# Altium PCB Sensor Bar 2.0 by GAO.PcbDoc (part 1 of 3)
Units mil, origin at the board's own origin, x right, y up, seen from the top; angles counter-clockwise.
Board outline 6710 x 1765 mil, 2 copper layers (Top Layer, Bottom Layer); 247 components, 162 nets, 624 pads, 280 vias.
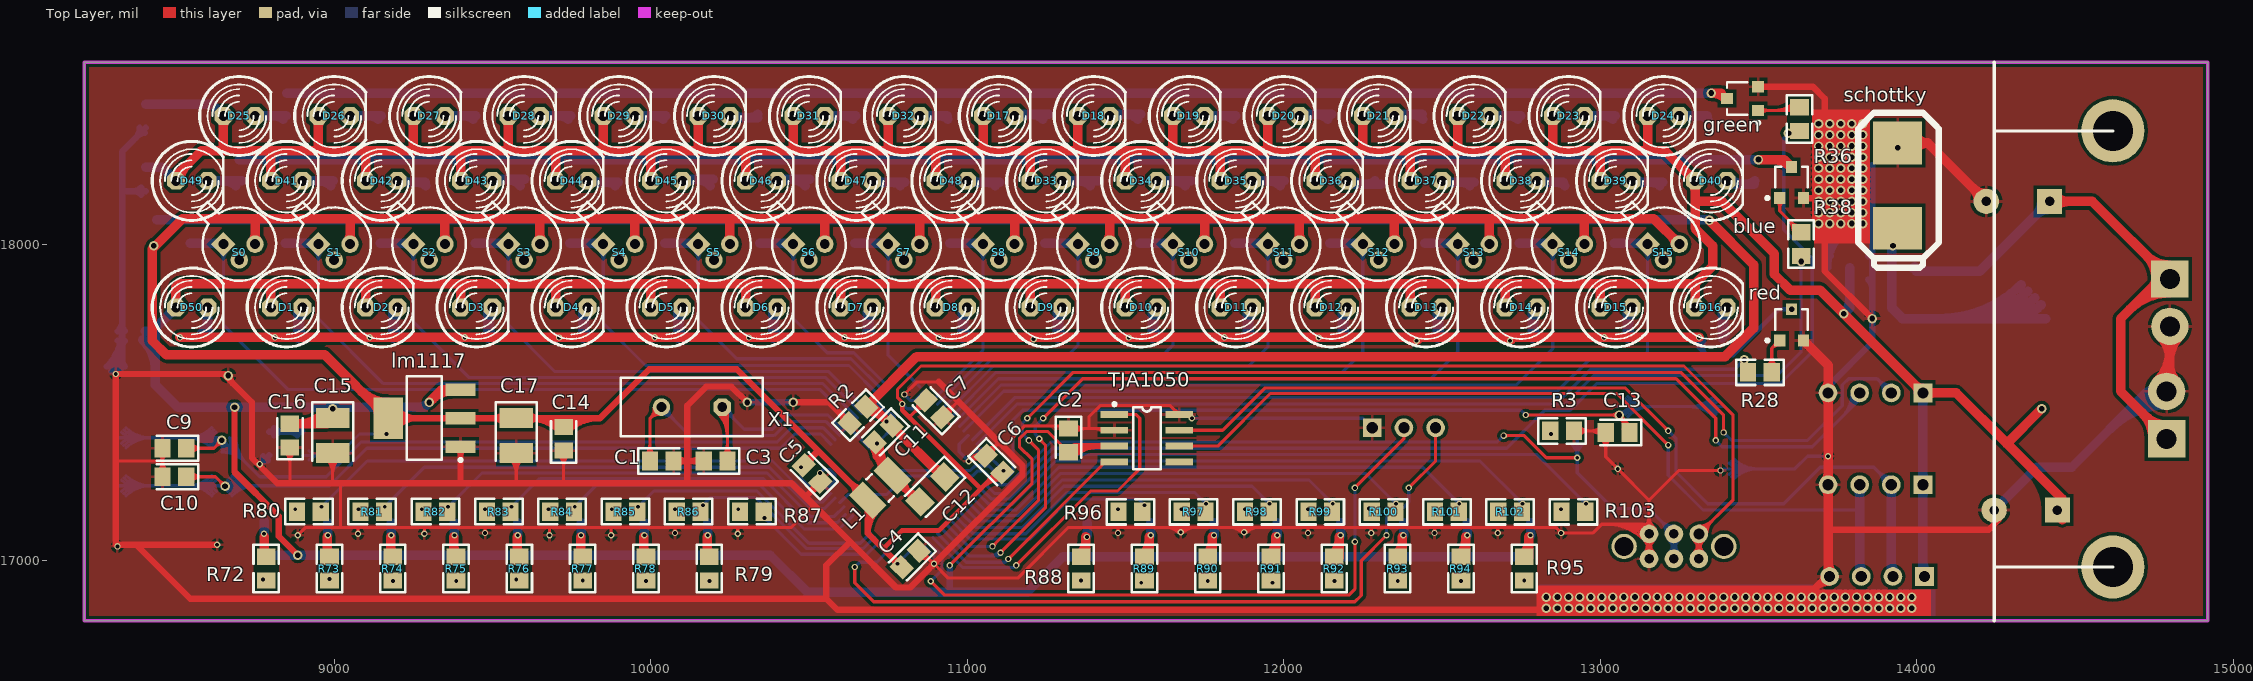
[diagram p0: Top Layer view]
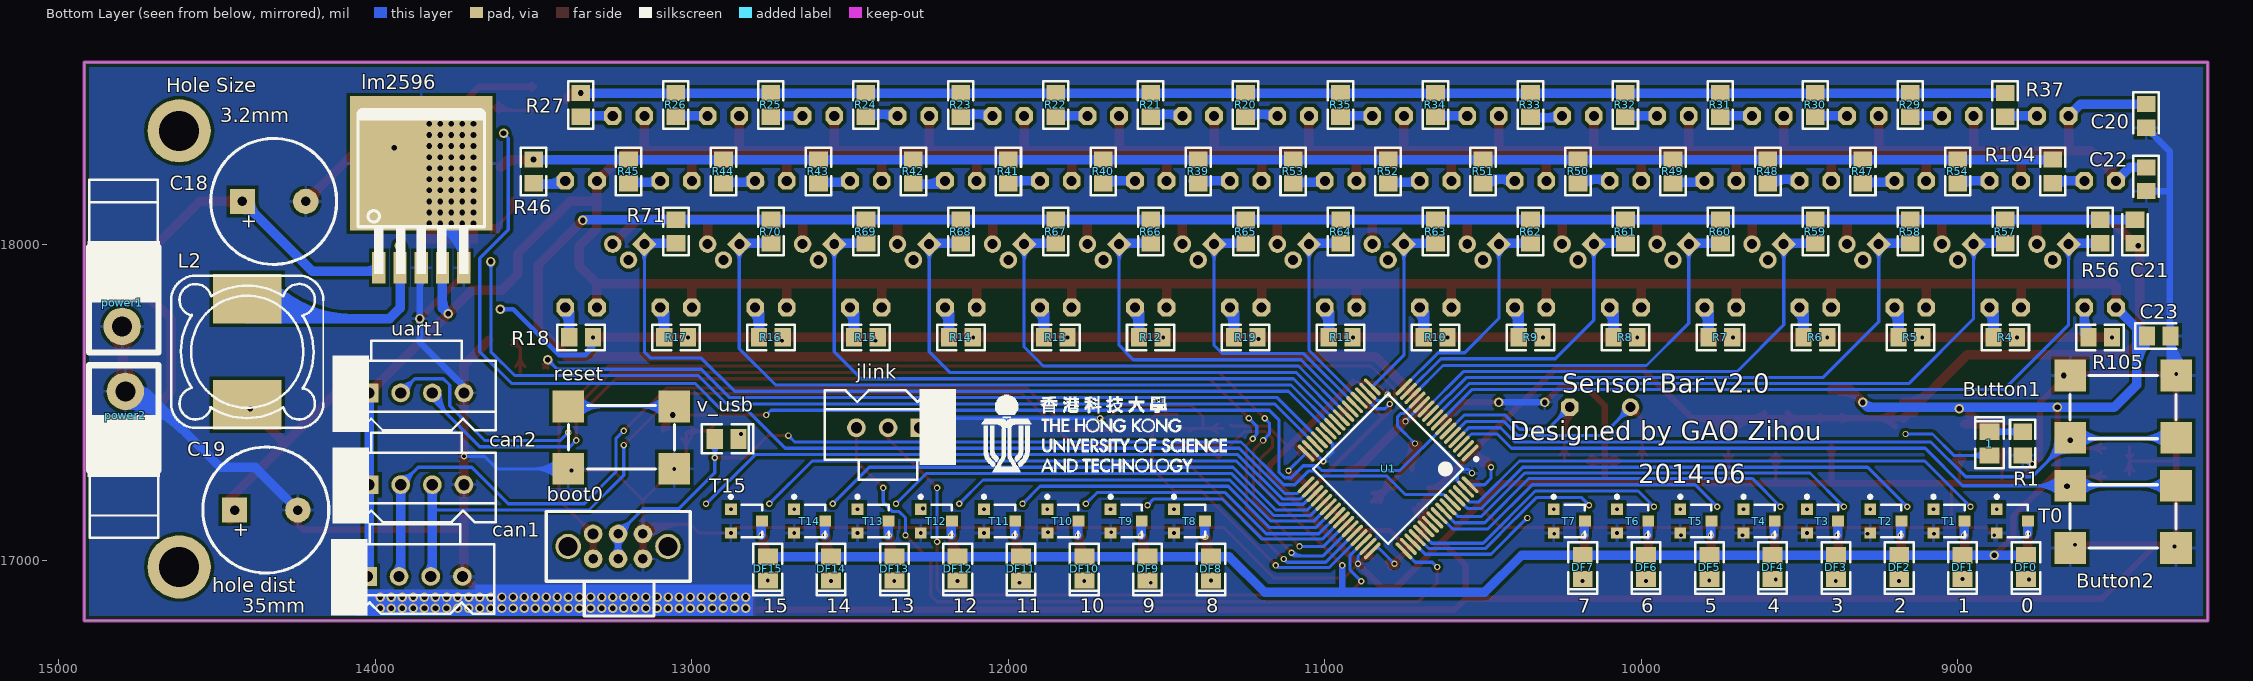
[diagram p1: Bottom Layer view, seen from below]
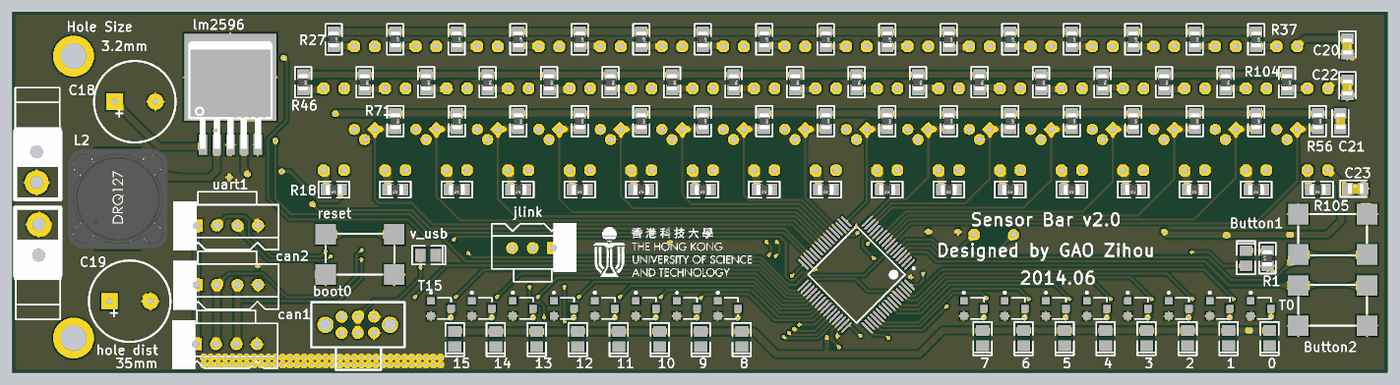
[diagram p4: 3D render of the assembled board from below, using the file's embedded part models]

## Layer stack, top to bottom
Top Solder: solder mask 0.4, Solder Resist, Dk 3.5
Top Layer: signal copper 1.4
Dielectric1: dielectric 12.6, FR-4, Dk 4.8
Bottom Layer: signal copper 1.4
Bottom Solder: solder mask 0.4, Solder Resist, Dk 3.5

## Board outline
8210,18575 8210,16810 14920,16810 14920,18575

## Design rules (kind name [scope] priority, off if disabled: settings)
Clearance [All] p1: gap=7
HoleSize [All] p1: absolutevalues=TRUE maxlimit=500 minlimit=1 maxpercent=80.000 minpercent=20.000
HoleToHoleClearance [All] p1: gap=0 allowstackedmicrovias=TRUE
MinimumSolderMaskSliver [All] p1: minsoldermaskwidth=0
PolygonConnect [All] p1: connectstyle=Relief reliefconductorwidth=10 reliefentries=4 polygonreliefangle="90 Angle" airgapwidth=10
RoutingVias [All] p1: holewidth=12 width=18 viastyle="Through Hole" minholewidth=12 minwidth=18 maxholewidth=100 maxwidth=200
SilkToSilkClearance [All] p1: silktosilkclearance=0
SilkToSolderMaskClearance SilkscreenOverComponentPads [IsPad] p1: minsilkscreentomaskgap=0 clearancetoexposedcopper=TRUE
SolderMaskExpansion [All] p1: expansion=4
UnpouredPolygon [All] p1: allowunpoured=FALSE
Width [All] p1: maxlimit=500 minlimit=10 preferedwidth=10
24 further rules are at their usual default settings.

## Classes and differential pairs
component class "Sensor Bar 2.0 RGB LED": blue green R28 R36 R38 red
component class redx: C20 D1 D2 D3 D4 D5 D6 D7 D8 D9 D10 D11 D12 D13 D14 D15 D16 D50 R4 R5 R6 R7 R8 R9 R10 R11 R12 R13 R14 R15 R16 R17 R18 R19 R105
component class green: C22 D17 D18 D19 D20 D21 D22 D23 D24 D25 D26 D27 D28 D29 D30 D31 D32 R20 R21 R22 R23 R24 R25 R26 R27 R29 R30 R31 R32 R33 R34 R35 R37
component class blue: C23 D33 D34 D35 D36 D37 D38 D39 D40 D41 D42 D43 D44 D45 D46 D47 D48 D49 R39 R40 R41 R42 R43 R44 R45 R46 R47 R48 R49 R50 R51 R52 R53 R54 R104
component class "Sensor Bar 2.0 by GAO": 1 *1 boot0 Button1 Button2 C1 C2 C3 C4 C5 C6 C7 C9 C10 C11 C12 C13 can1 can2 jlink L1 R1 R2 R3 reset T16 TJA1050 U1 uart1 v_usb X1
component class "Sensor Bar 2.0 regulators": C14 C15 C16 C17 C18 C19 L2 lm1117 lm2596 power1 power2 schottky
component class "Sensor Bar 2.0 sensors": C21 R56 R57 R58 R59 R60 R61 R62 R63 R64 R65 R66 R67 R68 R69 R70 R71 S0 S1 S2 S3 S4 S5 S6 S7 S8 S9 S10 S11 S12 S13 S14 S15
component class "Sensor Bar 2.0 signal LED": DF0 DF1 DF2 DF3 DF4 DF5 DF6 DF7 DF8 DF9 DF10 DF11 DF12 DF13 DF14 DF15 R72 R73 R74 R75 R76 R77 R78 R79 R80 R81 R82 R83 R84 R85 R86 R87 R88 R89 R90 R91 R92 R93 R94 R95 R96 R97 R98 R99 R100 R101 R102 R103 T0 T1 T2 T3 T4 T5 T6 T7 T8 T9 T10 T11 T12 T13 T14 T15

## Components (designator, comment, footprint, x,y, rotation, side; value= is the part's Value field where it differs from the comment)
1 "LED" "SMD _LED" 8900,17370 r270 bottom
blue "TO3400_MOSFET" npn 13610,18200 r0 top
boot0 "Power Switch" "POWER SWITCH" 13430,17045 r180 bottom
Button1 "Button" "PUSH SWITCH" 8310,17585 r0 bottom
Button2 "Button" "PUSH SWITCH" 8645,17040 r180 bottom
C1 "20pF" CC2012-0805 10035,17315 r0 top
C2 "100nF" CC2012-0805 11320,17380 r270 top
C3 "20pF" CC2012-0805 10205,17315 r180 top
C4 "100nF" CC2012-0805 10820,17005 r225 top
C5 "100nF" CC2012-0805 10510,17275 r135 top
C6 "100nF" CC2012-0805 11085,17305 r315 top
C7 "100nF" CC2012-0805 10895,17480 r135 top
C9 "100nF" CC2012-0805 8495,17355 r180 top
C10 "100nF" CC2012-0805 8495,17265 r180 top
C11 "100nF" CC2012-0805 10735,17400 r225 top
C12 "10uF" CC3216-1206 10890,17225 r225 top
C13 "100nF" CC2012-0805 13055,17405 r180 top
C14 "10nF" CC2012-0805 9725,17385 r90 top
C15 "10uF" CC3225-1210 8995,17395 r270 top
C16 "10nF" CC2012-0805 8860,17395 r90 top
C17 "10uF" CC3225-1210 9575,17395 r270 top
C18 "470uF" 470UF/50V 14420,18135 r180 bottom
C19 "470uF" 470UF/50V 14445,17160 r180 bottom
C20 "100nF" CC2012-0805 8405,18405 r270 bottom
C21 "100nF" CC2012-0805 8440,18040 r90 bottom
C22 "100nF" CC2012-0805 8405,18205 r270 bottom
C23 "100nF" CC2012-0805 8365,17710 r180 bottom
can1 "CONN0M" LOCKEDHDR-4 13875,16950 r180 bottom
can2 "CONN0M" LOCKEDHDR-4 13870,17240 r180 bottom
D1 "red_LED" LED5MM 8850,17800 r0 top
D2 "red_LED" LED5MM 9150,17800 r0 top
D3 "red_LED" LED5MM 9450,17800 r0 top
D4 "red_LED" LED5MM 9750,17800 r0 top
D5 "red_LED" LED5MM 10050,17800 r0 top
D6 "red_LED" LED5MM 10350,17800 r0 top
D7 "red_LED" LED5MM 10650,17800 r0 top
D8 "red_LED" LED5MM 10950,17800 r0 top
D9 "red_LED" LED5MM 11250,17800 r0 top
D10 "red_LED" LED5MM 11550,17800 r0 top
D11 "red_LED" LED5MM 11850,17800 r0 top
D12 "red_LED" LED5MM 12150,17800 r0 top
D13 "red_LED" LED5MM 12450,17800 r0 top
D14 "red_LED" LED5MM 12750,17800 r0 top
D15 "red_LED" LED5MM 13050,17800 r0 top
D16 "red_LED" LED5MM 13350,17800 r0 top
D17 "green_LED" LED5MM 11100,18405 r0 top
D18 "green_LED" LED5MM 11400,18405 r0 top
D19 "green_LED" LED5MM 11700,18405 r0 top
D20 "green_LED" LED5MM 12000,18405 r0 top
D21 "green_LED" LED5MM 12300,18405 r0 top
D22 "green_LED" LED5MM 12600,18405 r0 top
D23 "green_LED" LED5MM 12900,18405 r0 top
D24 "green_LED" LED5MM 13200,18405 r0 top
D25 "green_LED" LED5MM 8700,18405 r0 top
D26 "green_LED" LED5MM 9000,18405 r0 top
D27 "green_LED" LED5MM 9300,18405 r0 top
D28 "green_LED" LED5MM 9600,18405 r0 top
D29 "green_LED" LED5MM 9900,18405 r0 top
D30 "green_LED" LED5MM 10200,18405 r0 top
D31 "green_LED" LED5MM 10500,18405 r0 top
D32 "green_LED" LED5MM 10800,18405 r0 top
D33 "blue_LED" LED5MM 11250,18200 r0 top
D34 "blue_LED" LED5MM 11550,18200 r0 top
D35 "blue_LED" LED5MM 11850,18200 r0 top
D36 "blue_LED" LED5MM 12150,18200 r0 top
D37 "blue_LED" LED5MM 12450,18200 r0 top
D38 "blue_LED" LED5MM 12750,18200 r0 top
D39 "blue_LED" LED5MM 13050,18200 r0 top
D40 "blue_LED" LED5MM 13350,18200 r0 top
D41 "blue_LED" LED5MM 8850,18200 r0 top
D42 "blue_LED" LED5MM 9150,18200 r0 top
D43 "blue_LED" LED5MM 9450,18200 r0 top
D44 "blue_LED" LED5MM 9750,18200 r0 top
D45 "blue_LED" LED5MM 10050,18200 r0 top
D46 "blue_LED" LED5MM 10350,18200 r0 top
D47 "blue_LED" LED5MM 10650,18200 r0 top
D48 "blue_LED" LED5MM 10950,18200 r0 top
D49 "blue_LED" LED5MM 8550,18200 r0 top
D50 "red_LED" LED5MM 8550,17800 r0 top
DF0 "LED_feedback" "SMD _LED" 8785,16979.88 r90 bottom
DF1 "LED_feedback" "SMD _LED" 8985,16979.88 r90 bottom
DF2 "LED_feedback" "SMD _LED" 9185,16979.88 r90 bottom
DF3 "LED_feedback" "SMD _LED" 9385,16979.88 r90 bottom
DF4 "LED_feedback" "SMD _LED" 9585,16979.88 r90 bottom
DF5 "LED_feedback" "SMD _LED" 9785,16979.88 r90 bottom
DF6 "LED_feedback" "SMD _LED" 9985,16979.88 r90 bottom
DF7 "LED_feedback" "SMD _LED" 10185,16979.88 r90 bottom
DF8 "LED_feedback" "SMD _LED" 11360,16974.88 r90 bottom
DF9 "LED_feedback" "SMD _LED" 11560,16974.88 r90 bottom
DF10 "LED_feedback" "SMD _LED" 11760,16974.88 r90 bottom
DF11 "LED_feedback" "SMD _LED" 11960,16974.88 r90 bottom
DF12 "LED_feedback" "SMD _LED" 12160,16974.88 r90 bottom
DF13 "LED_feedback" "SMD _LED" 12360,16974.88 r90 bottom
DF14 "LED_feedback" "SMD _LED" 12560,16974.88 r90 bottom
DF15 "LED_feedback" "SMD _LED" 12760,16974.88 r90 bottom
green "TO3400_MOSFET" npn 13445,18465 r90 top
jlink "ARMP" LOCKEDHDR-3 12380,17420 r0 bottom
L1 "10uH" CR3225-1210 10725,17230 r225 top
L2 "100uH" MSS1260 14405,17660 r180 bottom
lm1117 "LM1117MP-3.3" MP04A_N 9285,17450 r180 top
lm2596 "lm2596" lm2596 13850,18250 r90 bottom
power1 "Component_1" PCBComponent_1 14805,17835 r270 bottom
power2 "Component_1" PCBComponent_1 14785,17440 r90 bottom
R1 "330R" CR2012-0805 8795,17370 r90 bottom
R2 "oR" CR2012-0805 10655,17460 r45 top
R3 "330R" CR2012-0805 12880,17410 r180 top
R4 "150R" CR2012-0805 8850,17705.4 r0 bottom
R5 "150R" CR2012-0805 9150,17705.4 r0 bottom
R6 "150R" CR2012-0805 9450,17705.4 r0 bottom
R7 "150R" CR2012-0805 9750,17705.4 r0 bottom
R8 "150R" CR2012-0805 10050,17705.4 r0 bottom
R9 "150R" CR2012-0805 10350,17705.4 r0 bottom
R10 "150R" CR2012-0805 10650,17705.4 r0 bottom
R11 "150R" CR2012-0805 10950,17705.4 r0 bottom
R12 "150R" CR2012-0805 11550,17705.4 r0 bottom
R13 "150R" CR2012-0805 11850,17705.4 r0 bottom
R14 "150R" CR2012-0805 12150,17705.4 r0 bottom
R15 "150R" CR2012-0805 12450,17705.4 r0 bottom
R16 "150R" CR2012-0805 12750,17705.4 r0 bottom
R17 "150R" CR2012-0805 13050,17705.4 r0 bottom
R18 "150R" CR2012-0805 13350,17705.4 r0 bottom
R19 "150R" CR2012-0805 11250,17705.4 r0 bottom
R20 "100R" CR2012-0805 11250.39,18440 r270 bottom
R21 "100R" CR2012-0805 11550.39,18440 r270 bottom
R22 "100R" CR2012-0805 11850.39,18440 r270 bottom
R23 "100R" CR2012-0805 12150.39,18440 r270 bottom
R24 "100R" CR2012-0805 12450.39,18440 r270 bottom
R25 "100R" CR2012-0805 12750.79,18440 r270 bottom
R26 "100R" CR2012-0805 13050.79,18440 r270 bottom
R27 "100R" CR2012-0805 13350.79,18440 r270 bottom
R28 "33R" CR2012-0805 13505,17595 r0 top
R29 "100R" CR2012-0805 9150.39,18440 r270 bottom
R30 "100R" CR2012-0805 9450.39,18440 r270 bottom
R31 "100R" CR2012-0805 9750.39,18440 r270 bottom
R32 "100R" CR2012-0805 10050.39,18440 r270 bottom
R33 "100R" CR2012-0805 10350.39,18440 r270 bottom
R34 "100R" CR2012-0805 10650.39,18440 r270 bottom
R35 "100R" CR2012-0805 10950.39,18440 r270 bottom
R36 "33R" CR2012-0805 13630,18395 r90 top
R37 "100R" CR2012-0805 8850.39,18440 r270 bottom
R38 "33R" CR2012-0805 13635,18000 r90 top
R39 "100R" CR2012-0805 11400,18230 r270 bottom
R40 "100R" CR2012-0805 11700,18230 r270 bottom
R41 "100R" CR2012-0805 12000,18230 r270 bottom
R42 "100R" CR2012-0805 12300,18230 r270 bottom
R43 "100R" CR2012-0805 12600,18230 r270 bottom
R44 "100R" CR2012-0805 12900,18230 r270 bottom
R45 "100R" CR2012-0805 13200,18230 r270 bottom
R46 "100R" CR2012-0805 13500,18230 r270 bottom
R47 "100R" CR2012-0805 9300,18230 r270 bottom
R48 "100R" CR2012-0805 9600,18230 r270 bottom
R49 "100R" CR2012-0805 9900,18230 r270 bottom
R50 "100R" CR2012-0805 10200,18230 r270 bottom
R51 "100R" CR2012-0805 10500,18230 r270 bottom
R52 "100R" CR2012-0805 10800,18230 r270 bottom
R53 "100R" CR2012-0805 11100,18230 r270 bottom
R54 "100R" CR2012-0805 9000,18230 r270 bottom
R56 "470k" CR2012-0805 8550,18040 r270 bottom
R57 "470k" CR2012-0805 8850,18040 r270 bottom
R58 "470k" CR2012-0805 9150,18040 r270 bottom
R59 "470k" CR2012-0805 9450,18040 r270 bottom
R60 "470k" CR2012-0805 9750,18040 r270 bottom
R61 "470k" CR2012-0805 10050,18040 r270 bottom
R62 "470k" CR2012-0805 10350,18040 r270 bottom
R63 "470k" CR2012-0805 10650,18040 r270 bottom
R64 "470k" CR2012-0805 10950,18040 r270 bottom
R65 "470k" CR2012-0805 11250,18040 r270 bottom
R66 "470k" CR2012-0805 11550,18040 r270 bottom
R67 "470k" CR2012-0805 11850,18040 r270 bottom
R68 "470k" CR2012-0805 12150,18040 r270 bottom
R69 "470k" CR2012-0805 12450,18040 r270 bottom
R70 "470k" CR2012-0805 12750,18040 r270 bottom
R71 "470k" CR2012-0805 13050,18040 r270 bottom
R72 "330R" CR2012-0805 8785,16975 r270 top
R73 "330R" CR2012-0805 8985,16975 r270 top
R74 "330R" CR2012-0805 9185,16975 r270 top
R75 "330R" CR2012-0805 9385,16975 r270 top
R76 "330R" CR2012-0805 9585,16975 r270 top
R77 "330R" CR2012-0805 9785,16975 r270 top
R78 "330R" CR2012-0805 9985,16975 r270 top
R79 "330R" CR2012-0805 10185,16975 r270 top
R80 "10k" CR2012-0805 8920,17155 r0 top
R81 "10k" CR2012-0805 9120,17155 r0 top
R82 "10k" CR2012-0805 9320,17155 r0 top
R83 "10k" CR2012-0805 9520,17155 r0 top
R84 "10k" CR2012-0805 9720,17155 r0 top
R85 "10k" CR2012-0805 9920,17155 r0 top
R86 "10k" CR2012-0805 10120,17155 r0 top
R87 "10k" CR2012-0805 10320,17155 r0 top
R88 "330R" CR2012-0805 11360,16975 r270 top
R89 "330R" CR2012-0805 11560,16975 r270 top
R90 "330R" CR2012-0805 11760,16975 r270 top
R91 "330R" CR2012-0805 11960,16975 r270 top
R92 "330R" CR2012-0805 12160,16975 r270 top
R93 "330R" CR2012-0805 12360,16975 r270 top
R94 "330R" CR2012-0805 12560,16975 r270 top
R95 "330R" CR2012-0805 12760,16975 r270 top
R96 "10k" CR2012-0805 11515.63,17154.21 r0 top
R97 "10k" CR2012-0805 11715.63,17154.21 r0 top
R98 "10k" CR2012-0805 11915.63,17154.21 r0 top
R99 "10k" CR2012-0805 12115.63,17154.21 r0 top
R100 "10k" CR2012-0805 12315.63,17154.21 r0 top
R101 "10k" CR2012-0805 12515.63,17154.21 r0 top
R102 "10k" CR2012-0805 12715.63,17154.21 r0 top
R103 "10k" CR2012-0805 12915.63,17154.21 r0 top
R104 "100R" CR2012-0805 8700,18230 r270 bottom
R105 "150R" CR2012-0805 8550,17705.4 r0 bottom
red "TO3400_MOSFET" npn 13610,17750 r0 top
reset "Button" "PUSH SWITCH" 13390,17290 r180 bottom
S0 "3du5c" CAN-3/D5.9 8700,18000 r0 top
S1 "3du5c" CAN-3/D5.9 9000,18000 r0 top
S2 "3du5c" CAN-3/D5.9 9300,18000 r0 top
S3 "3du5c" CAN-3/D5.9 9600,18000 r0 top
S4 "3du5c" CAN-3/D5.9 9900,18000 r0 top
S5 "3du5c" CAN-3/D5.9 10200,18000 r0 top
S6 "3du5c" CAN-3/D5.9 10500,18000 r0 top
S7 "3du5c" CAN-3/D5.9 10800,18000 r0 top
S8 "3du5c" CAN-3/D5.9 11100,18000 r0 top
S9 "3du5c" CAN-3/D5.9 11400,18000 r0 top
S10 "3du5c" CAN-3/D5.9 11700,18000 r0 top
S11 "3du5c" CAN-3/D5.9 12000,18000 r0 top
S12 "3du5c" CAN-3/D5.9 12300,18000 r0 top
S13 "3du5c" CAN-3/D5.9 12600,18000 r0 top
S14 "3du5c" CAN-3/D5.9 12900,18000 r0 top
S15 "3du5c" CAN-3/D5.9 13200,18000 r0 top
schottky "D Schottky SS84" sch_diode 13945,18190 r90 top
T0 "bc847" npn 8822.5,17120 r270 bottom
T1 "bc847" npn 9022.5,17120 r270 bottom
T2 "bc847" npn 9222.5,17120 r270 bottom
T3 "bc847" npn 9422.5,17120 r270 bottom
T4 "bc847" npn 9622.5,17120 r270 bottom
T5 "bc847" npn 9822.5,17120 r270 bottom
T6 "bc847" npn 10022.5,17120 r270 bottom
T7 "bc847" npn 10222.5,17120 r270 bottom
T8 "bc847" npn 11422.5,17120 r270 bottom
T9 "bc847" npn 11622.5,17120 r270 bottom
T10 "bc847" npn 11822.5,17120 r270 bottom
T11 "bc847" npn 12022.5,17120 r270 bottom
T12 "bc847" npn 12222.5,17120 r270 bottom
T13 "bc847" npn 12422.5,17120 r270 bottom
T14 "bc847" npn 12622.5,17120 r270 bottom
T15 "bc847" npn 12822.5,17120 r270 bottom
TJA1050 "tja1050" ad8210 11570,17370 r0 top
U1 "STM32F103RBT6" LQFP64_N 10800,17290 r315 bottom
uart1 "CONN0M" LOCKEDHDR-4 13870,17530 r180 bottom
v_usb "LED" "SMD _LED" 12890,17385 r0 bottom
X1 "8.000MHz" BCY-W2/E4.7 10130,17485 r180 top

## Footprints (in the part's own frame and the unit in brackets; to place one, negate y for a bottom-side part, rotate by r counter-clockwise, add the part's x,y. Pads: shape width x height; smd on the part's side, far side on the other; paste and mask are expansions set on the pad)
470UF/50V [mil]
  rect 80x80 hole 30: 1(0,0)
  round 80 hole 30: 2(200,0)
  silkscreen extent -100,-199 298,199
ad8210 [mm]
  rect 2.2x0.55 smd: 1(-2.66,2.337) 2(-2.66,1.067) 3(-2.66,-0.203) 4(-2.66,-1.473) 5(2.54,-1.473) 6(2.54,-0.203) 7(2.54,1.067) 8(2.54,2.337)
  silkscreen extent -2.78,-2.07 1.04,3.29, body extent -3,-2.07 3,2.83, height 1.7
BCY-W2/E4.7 [mm]
  oct 1.4x1.4 hole 0.8: 1(-2.44,-0.002)
  round 1.4 hole 0.8: 2(2.44,-0.002)
  silkscreen extent -5.7,-2.35 5.7,2.35
CAN-3/D5.9 [mm]
  rect 1.4x1.4 hole 0.8 rot 45: 1(-1.27,0)
  round 1.4 hole 0.8: 2(0,-1.27) 3(1.27,0)
  silkscreen extent -3.39,-2.95 2.95,3.39
CC2012-0805 [mm] "Chip Capacitor; Body 2.0 x 1.2 mm (LxW typ)"
  rect 1.3x1.5 smd: 1(-0.95,0) 2(0.95,0)
  silkscreen extent -1.91,-1.02 1.4,1.02, body extent -1,-0.64 1,0.62, height 0.78
CC3216-1206 [mm] "Chip Capacitor; Body 3.2 x 1.6 mm (LxW typ)"
  rect 1.6x1.8 smd: 1(-1.4,0) 2(1.4,0)
  silkscreen extent -2.54,-1.19 1.93,1.19, body extent -1.63,-0.84 1.57,0.76, height 1
CC3225-1210 [mm] "Chip Capacitor; Body 3.2 x 2.5 mm (LxW typ)"
  rect 1.6x2.7 smd: 1(-1.4,0) 2(1.4,0)
  silkscreen extent -2.67,-1.65 2.03,1.65
CR2012-0805 [mm] "Chip Resistor; Body 2.0 x 1.3 mm (LxW typ)"
  rect 1.3x1.5 smd: 1(-0.95,0) 2(0.95,0)
  silkscreen extent -1.91,-1.02 1.91,1.02, body extent -1,-0.62 1,0.64, height 0.78
CR3225-1210 [mm] "Chip Resistor; Body 3.2 x 2.5 mm (LxW typ)"
  rect 1.6x2.7 smd: 1(-1.4,0) 2(1.4,0)
  silkscreen extent -0.3,-1.25 0.3,1.25, body extent -1.05,-0.74 0.97,0.53, height 0.61
LED5MM [mil] "LED 5 mm, round"
  oct 56x56 hole 32: 1(-50,0) 2(50,0)
  silkscreen extent -125,-125 100,125
lm2596 [mil]
  rect 425x450 smd: 0(5,5)
  rect 100x42 smd: 1(-325,139) 2(-325,72) 3(-325,5) 4(-325,-62) 5(-325,-129)
  silkscreen extent -345,-195 175,205
LOCKEDHDR-3 [mm] "3-pin header with lock"
  rect 1.5x1.5 hole 0.9: 1(-2.54,0)
  round 1.5 hole 0.9: 2(0,0) 3(2.54,0)
  silkscreen extent -5.46,-3.13 5.08,4.18
LOCKEDHDR-4 [mm] "5-pin header with lock"
  rect 1.5x1.5 hole 0.9: 1(-3.81,0)
  round 1.5 hole 0.9: 2(-1.27,0) 3(1.27,0) 4(3.81,0)
  silkscreen extent -6.73,-3.13 6.37,4.18
LQFP64_N [mm]
  oval 1.8x0.3 smd: 1(-5.55,3.75) 2(-5.55,3.25) 3(-5.55,2.75) 4(-5.55,2.25) 5(-5.55,1.75) 6(-5.55,1.25) 7(-5.55,0.75) 8(-5.55,0.25) 9(-5.55,-0.25) 10(-5.55,-0.75) 11(-5.55,-1.25) 12(-5.55,-1.75) 13(-5.55,-2.25) 14(-5.55,-2.75) 15(-5.55,-3.25) 16(-5.55,-3.75) 33(5.55,-3.75) 34(5.55,-3.25) 35(5.55,-2.75) 36(5.55,-2.25) 37(5.55,-1.75) 38(5.55,-1.25) 39(5.55,-0.75) 40(5.55,-0.25) 41(5.55,0.25) 42(5.55,0.75) 43(5.55,1.25) 44(5.55,1.75) 45(5.55,2.25) 46(5.55,2.75) 47(5.55,3.25) 48(5.55,3.75)
  oval 0.3x1.8 smd: 17(-3.75,-5.55) 18(-3.25,-5.55) 19(-2.75,-5.55) 20(-2.25,-5.55) 21(-1.75,-5.55) 22(-1.25,-5.55) 23(-0.75,-5.55) 24(-0.25,-5.55) 25(0.25,-5.55) 26(0.75,-5.55) 27(1.25,-5.55) 28(1.75,-5.55) 29(2.25,-5.55) 30(2.75,-5.55) 31(3.25,-5.55) 32(3.75,-5.55) 49(3.75,5.55) 50(3.25,5.55) 51(2.75,5.55) 52(2.25,5.55) 53(1.75,5.55) 54(1.25,5.55) 55(0.75,5.55) 56(0.25,5.55) 57(-0.25,5.55) 58(-0.75,5.55) 59(-1.25,5.55) 60(-1.75,5.55) 61(-2.25,5.55) 62(-2.75,5.55) 63(-3.25,5.55) 64(-3.75,5.55)
  silkscreen extent -5.67,-4.25 4.25,4.57
MP04A_N [mm] "SOT223, 4-Leads, Body 6.5x3.5mm, Pitch 2.3mm, Lead Span 7mm, IPC Medium Density"
  rect 2.4x1 smd: 1(-2.9,2.3) 2(-2.9,0) 3(-2.9,-2.3)
  rect 2.4x3.3 smd: 4(2.9,0)
  silkscreen extent -3.03,-3.35 1.4,3.47, body extent -1.85,-3.35 1.85,3.35, height 1.8
MSS1260 [mm]
  rect 5.5x4 smd: 1(0.004,4.25) 2(0.004,-4.25)
  silkscreen extent -6.1,-6.1 6.1,6.1, body extent -6.22,-6.25 6.28,6.25, height 7.5
npn [mm]
  rect 0.9x0.95 smd: 1(-1.077,-1.377) 2(0.823,-1.377) 3(-0.127,1.123)
  silkscreen extent -2.2,-1.5 1.17,1.12
PCBComponent_1 [mm]
  rect 3x3 hole 1.6: 1(-1.397,0.127)
  round 3 hole 1.6: 2(2.413,0.127)
  silkscreen extent -9.35,-2.67 4.5,3.17
"POWER SWITCH" [mm]
  round 2.032 hole 1.524: 0(1,0) 0(9,0)
  round 1.5 hole 0.762: 1(3,-1) 3(5,-1) 4(5,1) 5(7,-1) 6(7,1)
  round 1.5 hole 0.9: 2(3,1)
  silkscreen extent -0.76,-5.59 10.79,2.79
"PUSH SWITCH" [mm]
  rect 2.54x2.54 smd: 1(0,0) 1(8.5,0) 2(0,5) 2(8.5,5)
  silkscreen extent 0,0 8.51,5.08
sch_diode [mil]
  rect 135x155 smd: 1(-140,5) 2(130,5)
  silkscreen extent -265,-125 225,130
"SMD _LED" [mm]
  rect 1.3x1.6 smd: 1(0.95,0) 2(-0.95,0)
  silkscreen extent -2.13,-1.15 2,1.15

## Part data
1 v_usb: library part LED1, "Typical RED GaAs LED"
blue green red: library part TO3400_MOSF
Button1 Button2 reset: library part SW-SPST, "Single-Pole, Single-Throw Switch"
C1 C2 C3 C4 C5 C6 C7 C9 C10 C11 C12 C13 C14 C15 C16 C17 C20 C21 C22 C23: library part "Cap Semi", "Capacitor (Semiconductor SIM Model)"
C18 C19: library part "Cap Pol3", "Polarized Capacitor (Surface Mount)"
can1 can2 uart1: library part "Header 4", "Header, 4-Pin"
D1 D2 D3 D4 D5 D6 D7 D8 D9 D10 D11 D12 D13 D14 D15 D16 D17 D18 D19 D20 D21 D22 D23 D24 D25 D26 D27 D28 D29 D30 D31 D32 D33 D34 D35 D36 D37 D38 D39 D40 D41 D42 D43 D44 D45 D46 D47 D48 D49 D50 DF0 DF1 DF2 DF3 DF4 DF5 DF6 DF7 DF8 DF9 DF10 DF11 DF12 DF13 DF14 DF15: library part LED, "Typical RED GaAs LED"
jlink: library part "Header 3", "Header, 3-Pin"
L1 L2: library part Inductor, "Inductor"
lm1117: "800mA Low-Dropout Linear Regulator"
lm2596: library part Component_1
R1 R2 R3 R4 R5 R6 R7 R8 R9 R10 R11 R12 R13 R14 R15 R16 R17 R18 R19 R20 R21 R22 R23 R24 R25 R26 R27 R28 R29 R30 R31 R32 R33 R34 R35 R36 R37 R38 R39 R40 R41 R42 R43 R44 R45 R46 R47 R48 R49 R50 R51 R52 R53 R54 R56 R57 R58 R59 R60 R61 R62 R63 R64 R65 R66 R67 R68 R69 R70 R71 R72 R73 R74 R75 R76 R77 R78 R79 R80 R81 R82 R83 R84 R85 R86 R87 R88 R89 R90 R91 R92 R93 R94 R95 R96 R97 R98 R99 R100 R101 R102 R103 R104 R105: library part Res2, "Resistor"
S0 S1 S2 S3 S4 S5 S6 S7 S8 S9 S10 S11 S12 S13 S14 S15: library part Light
schottky: library part "D Schottky", "Sch"
U1: "STM32 ARM-based 32-bit MCU with 128 Kbytes Flash, 64-pin LQFP, Industrial Temperature"
X1: library part XTAL, "Crystal Oscillator"

## Free pads (board coordinates)
  round 200 hole 125.98: 2(14620,16980) 2(14620,18358)

## Via types
v1: diameter 30, hole 18, Top Layer to Bottom Layer, 141 vias
v2: diameter 20, hole 12, Top Layer to Bottom Layer, 139 vias

## Nets (pads, with @x,y where several pads share a name; then routed paths per layer and width w, separated by ;. In a path a pad name is that pad's centre, name@x,y a point inside that pad or via, vN(x,y) a via of type N, cw(c..) or ccw(c..) an arc to the next point about the centre after c; other vN are vias at no path point)
AGND: C11.1 C12.1 C21.2 R2.2 R56.1 R57.1 R58.1 R59.1 R60.1 R61.1 R62.1 R63.1 R64.1 R65.1 R66.1 R67.1 R68.1 R69.1 R70.1 R71.1 U1.12 | length 8736.2
  Top Layer w30: R2.2@10684.23,17473.07 cw(c10684.23,17399.22) 10736.45,17451.44 ; 10889.4,17298.49 ccw(c10926.19,17335.28) C12.1@10926.19,17283.25 ; C12.1@10923.92,17263.97 C11.1@10761.45,17426.45 10701.45,17486.45 R2.2@10681.45,17486.45 10840,17645 13395,17645 13485,17735 13485,17935 v1(13345,18075)
  Bottom Layer w10: U1.12@10694.21,17493.22 10694.21,17490.79 v2(10745,17440) ; v2@10740,17440 ccw(c10727.93,17440) 10736.46,17448.54 ccw(c10745,17457.07) v2@10745,17445
  Bottom Layer w30: C21.2@8440,18077.4 R56.1@8550,18077.4 R57.1@8850,18077.4 R58.1@9150,18077.4 R59.1@9450,18077.4 R60.1@9750,18077.4 R61.1@10050,18077.4 R62.1@10350,18077.4 R63.1@10650,18077.4 R64.1@10950,18077.4 R65.1@11250,18077.4 R66.1@11550,18077.4 R67.1@11850,18077.4 R68.1@12150,18077.4 R69.1@12450,18077.4 R70.1@12750,18077.4 R71.1@13050,18077.4 v1@13345,18077.4
BLUE: R38.1 U1.30 | length 3047.8
  Bottom Layer w10: U1.30@11031.06,17367.95 11158.11,17495 12890,17495 12980,17585 13560,17585 13635,17660 v1(13635,17945) ; v1@13627.93,17937.93 cw(c13610.86,17920.86) 13635,17920.86 cw(c13659.14,17920.86) v1@13642.07,17937.93
BLUEGND: blue.3 R39.1 R40.1 R41.1 R42.1 R43.1 R44.1 R45.1 R46.1 R47.1 R48.1 R49.1 R50.1 R51.1 R52.1 R53.1 R54.1 R104.1 | length 4979.3
  Top Layer w30: v1(13500,18267.4) 13581.81,18267.4 blue.3@13605,18244.21 ; 13544.84,18267.4 cw(c13544.84,18185.03) blue.3@13603.08,18243.28
  Bottom Layer w30: R104.1@8700,18267.4 R54.1@9000,18267.4 R47.1@9300,18267.4 R48.1@9600,18267.4 R49.1@9900,18267.4 R50.1@10200,18267.4 R51.1@10500,18267.4 R52.1@10800,18267.4 R53.1@11100,18267.4 R39.1@11400,18267.4 R40.1@11700,18267.4 R41.1@12000,18267.4 R42.1@12300,18267.4 R43.1@12600,18267.4 R44.1@12900,18267.4 R45.1@13200,18267.4 v1(13500,18267.4)
BUTTON1: Button1.2 C9.1 U1.4 | length 3922.2
  Top Layer w10: C9.1@8532.4,17355 8620,17355 v1(8645,17380) ; C9.1@8546.96,17340.44 cw(c8582.11,17305.29) 8582.11,17355 cw(c8582.11,17404.71) C9.1@8546.96,17369.56 ; v1@8635,17380 cw(c8610.86,17380) 8627.93,17362.93 cw(c8645,17345.86) v1@8645,17370
  Bottom Layer w10: Button1.2@8310,17388.15 Button1.2@8644.65,17388.15 ; Button1.2@8327.68,17370.47 cw(c8370.36,17327.79) 8370.36,17388.15 cw(c8370.36,17448.5) Button1.2@8327.68,17405.83 ; Button1.2@8334.75,17363.4 cw(c8394.5,17303.65) 8394.5,17388.15 cw(c8394.5,17472.65) Button1.2@8334.75,17412.9 ; Button1.2@8341.82,17356.33 cw(c8418.64,17279.51) 8418.64,17388.15 cw(c8418.64,17496.79) Button1.2@8341.82,17419.97 ; Button1.2@8601.18,17388.15 cw(c8601.18,17336.18) Button1.2@8637.93,17372.93 ; Button1.2@8612.83,17356.33 ccw(c8536.01,17279.51) 8536.01,17388.15 ccw(c8536.01,17496.79) Button1.2@8612.83,17419.97 ; Button1.2@8619.9,17363.4 ccw(c8560.15,17303.65) 8560.15,17388.15 ccw(c8560.15,17472.65) Button1.2@8619.9,17412.9 ; Button1.2@8625.33,17388.15 cw(c8625.33,17360.33) v1(8645,17380) ; Button1.2@8626.97,17370.47 ccw(c8584.29,17327.79) 8584.29,17388.15 ccw(c8584.29,17448.5) Button1.2@8626.97,17405.83 ; Button1.2@8644.65,17343.15 cw(c8644.65,17241.26) 8716.69,17313.31 ; Button1.2@8644.65,17353.15 cw(c8644.65,17275.4) 8699.62,17330.38 ; Button1.2@8644.65,17363.15 cw(c8644.65,17309.54) Button1.2@8682.55,17347.45 ; Button1.2@8645,17370 cw(c8645,17333.79) Button1.2@8670.61,17359.39 ; Button1.2@8655,17375 8765,17265 8975,17265 9085,17375 10400,17375 10445,17420 10544.73,17420 U1.4@10582.86,17381.87 ; Button1.2@8655,17380 ccw(c8667.07,17380) Button1.2@8658.54,17371.46 ; Button1.2@8669.65,17388.15 ccw(c8736.75,17388.15) Button1.2@8689.3,17340.7 ; Button1.2@8679.65,17388.15 ccw(c8770.89,17388.15) 8706.37,17323.63 ; Button1.2@8689.65,17388.15 ccw(c8805.03,17388.15) 8723.44,17306.56
BUTTON2: Button2.2 C10.1 U1.3 | length 3860.9
  Top Layer w10: C10.1@8532.4,17265 8625,17265 v1(8655,17235) ; C10.1@8546.96,17250.44 cw(c8582.11,17215.29) 8582.11,17265 cw(c8582.11,17314.71) C10.1@8546.96,17279.56 ; v1@8645,17235 ccw(c8620.86,17235) 8637.93,17252.07 ccw(c8655,17269.14) v1@8655,17245
  Bottom Layer w10: Button2.2@8310.35,17236.85 Button2.2@8645,17236.85 8985,17236.85 9103.15,17355 10410,17355 10455.04,17400.04 10536.85,17400.04 U1.3@10568.94,17367.95 ; Button2.2@8328.03,17219.17 cw(c8370.71,17176.5) 8370.71,17236.85 cw(c8370.71,17297.21) Button2.2@8328.03,17254.53 ; Button2.2@8335.1,17212.1 cw(c8394.85,17152.35) 8394.85,17236.85 cw(c8394.85,17321.35) Button2.2@8335.1,17261.6 ; Button2.2@8342.17,17205.03 cw(c8418.99,17128.21) 8418.99,17236.85 cw(c8418.99,17345.49) Button2.2@8342.17,17268.67 ; Button2.2@8613.18,17205.03 ccw(c8536.36,17128.21) 8536.36,17236.85 ccw(c8536.36,17345.49) Button2.2@8613.18,17268.67 ; Button2.2@8620.25,17212.1 ccw(c8560.5,17152.35) 8560.5,17236.85 ccw(c8560.5,17321.35) Button2.2@8620.25,17261.6 ; Button2.2@8626.39,17236.85 cw(c8626.39,17206.39) Button2.2@8647.93,17227.93 ; Button2.2@8627.32,17219.17 ccw(c8584.64,17176.5) 8584.64,17236.85 ccw(c8584.64,17297.21) Button2.2@8627.32,17254.53 ; Button2.2@8635.33,17236.85 ccw(c8635.33,17254.67) Button2.2@8647.93,17242.07 ; Button2.2@8662.07,17227.93 cw(c8683.61,17206.39) Button2.2@8683.61,17236.85 ; Button2.2@8662.07,17242.07 ccw(c8674.67,17254.67) Button2.2@8674.67,17236.85 ; Button2.2@8662.68,17219.17 cw(c8705.36,17176.5) 8705.36,17236.85 cw(c8705.36,17297.21) Button2.2@8662.68,17254.53 ; Button2.2@8669.75,17212.1 cw(c8729.5,17152.35) 8729.5,17236.85 cw(c8729.5,17321.35) Button2.2@8669.75,17261.6 ; Button2.2@8676.82,17205.03 cw(c8753.64,17128.21) 8753.64,17236.85 cw(c8753.64,17345.49) Button2.2@8676.82,17268.67
CAN_RX: TJA1050.4 U1.44 | length 766.8
  Top Layer w10: v2(11130,17005) 11437,17312 TJA1050.4@11465.28,17312 ; v2@11130,17010 ccw(c11130,17022.07) 11138.54,17013.54 ccw(c11147.07,17005) v2@11135,17005 ; 11419.88,17294.88 ccw(c11402.75,17312) TJA1050.4@11426.97,17312
  Bottom Layer w10: U1.44@10905.79,17086.78 10997.56,16995 11120,16995 v2(11130,17005)
CAN_TX: TJA1050.1 U1.45 | length 1107.4
  Top Layer w10: v2(11155,16985) 11390,17220 11475,17220 11545,17290 11545,17450 11533,17462 TJA1050.1@11465.28,17462 ; v2@11155,16990 ccw(c11155,17002.07) 11163.54,16993.54 ccw(c11172.07,16985) v2@11160,16985 ; TJA1050.1@11501.88,17457.88 cw(c11511.82,17447.93) 11511.82,17462 cw(c11511.82,17476.07) TJA1050.1@11501.88,17466.12
  Bottom Layer w10: U1.45@10891.87,17072.86 10986.73,16978 11148,16978 v2(11155,16985)
CANH: can1.2 can2.2 TJA1050.7 | length 3177.4
  Top Layer w10: TJA1050.7@11670,17412 11807,17412 11940,17545 13080,17545 v2(13215,17410) ; TJA1050.7@11706.6,17407.88 cw(c11716.55,17397.93) 11716.55,17412 cw(c11716.55,17426.07) TJA1050.7@11706.6,17416.12 ; v2@13210,17410 ccw(c13197.93,17410) 13206.46,17418.54 ccw(c13215,17427.07) v2@13215,17415
  Bottom Layer w10: v2@13215,17405 cw(c13215,17392.93) 13223.54,17401.46 cw(c13232.07,17410) v2@13220,17410 ; v2(13215,17410) 13240,17385 13240,17280 13340,17180 13580,17180 13695,17295 13865,17295 can2.2@13920,17240 ; can2.2@13895.47,17240 ccw(c13836.26,17240) 13878.13,17281.87 ccw(c13920,17323.74) can2.2@13920,17264.53 ; can2.2@13905.47,17240 ccw(c13870.4,17240) 13895.2,17264.8 ccw(c13920,17289.6) can2.2@13920,17254.53
  Bottom Layer w30: can2.2@13909.73,17229.73 cw(c13884.93,17204.93) 13920,17204.93 cw(c13955.07,17204.93) can2.2@13930.27,17229.73 ; can1.2@13920,16955 can2.2@13920,17240 ; 13920,16997.14 ccw(c13972.14,16997.14) can1.2@13935.27,16960.27
CANL: can1.3 can2.3 TJA1050.6 | length 2867.9
  Top Layer w10: TJA1050.6@11670,17362 11792,17362 11958,17528 13052,17528 v2(13215,17365) ; TJA1050.6@11706.6,17357.88 cw(c11716.55,17347.93) 11716.55,17362 cw(c11716.55,17376.07) TJA1050.6@11706.6,17366.12 ; v2@13210,17365 ccw(c13197.93,17365) 13206.46,17373.54 ccw(c13215,17382.07) v2@13215,17370
  Bottom Layer w10: v2@13211.46,17361.46 cw(c13202.93,17352.93) 13215,17352.93 cw(c13227.07,17352.93) v2@13218.54,17361.46 ; v2(13215,17365) 13215,17270 13325,17160 13820,17160
  Bottom Layer w30: can2.3@13809.73,17229.73 cw(c13784.93,17204.93) 13820,17204.93 cw(c13855.07,17204.93) can2.3@13830.27,17229.73 ; can1.3@13820,16955 13820,17160 can2.3@13820,17240 ; 13820,16997.14 ccw(c13872.14,16997.14) can1.3@13835.27,16960.27
FB0: DF0.2 R72.2
  other v2: 8775,16940
FB1: DF1.2 R73.2
  other v2: 8985,16942.48
FB2: DF2.2 R74.2
  other v2: 9185.39,16935.63
FB3: DF3.2 R75.2
  other v2: 9385.39,16935.63
FB4: DF4.2 R76.2
  other v2: 9575,16940
FB5: DF5.2 R77.2
  other v2: 9785,16937.6
FB6: DF6.2 R78.2
  other v2: 9985.39,16935.63
FB7: DF7.2 R79.2
  other v2: 10185.39,16935.63
FB8: DF8.2 R88.2
  other v2: 11360,16937.48
FB9: DF9.2 R89.2
  other v2: 11550,16930
FB10: DF10.2 R90.2
  other v2: 11760.39,16935.63
FB11: DF11.2 R91.2
  other v2: 11965,16930
FB12: DF12.2 R92.2
  other v2: 12160.39,16935.63
FB13: DF13.2 R93.2
  other v2: 12360.39,16935.63
FB14: DF14.2 R94.2
  other v2: 12560.39,16935.63
FB15: DF15.2 R95.2
  other v2: 12760,16937.6